# EAGLE board untitled (EAGLE 5.11)
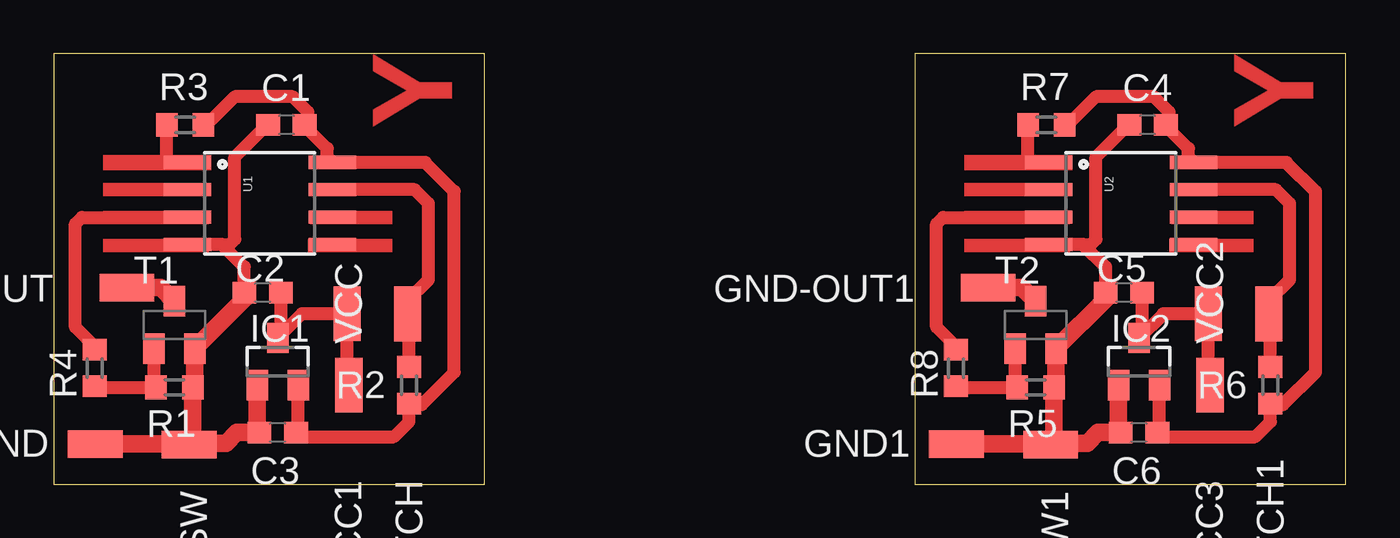
[diagram p0: board, top side]

Size 60 x 20 mm. Coordinates in mm from the lower left corner, seen from the top.
Outline: 0,0 20,0 20,20 0,20 0,0
Outline: 40,0 60,0 60,20 40,20 40,0
Copper layers (1*16): Top 0.035mm / dielectric 1.5mm / Bottom 0.035mm
Design rules "default": minimum track width 10mil, minimum drill 24mil, track to track 8mil, track to pad 8mil, pad to pad 8mil, via to via 8mil, smd to smd 8mil, copper to edge 40mil, drill to drill 8mil, minimum pad ring 10mil, minimum via ring 8mil, stop-mask expansion 4mil, vias tented up to drill 0mil, thermal gap 10mil

## Footprints (pad centres in the part's own frame; a part is rotated, then mirrored left to right if it is on the bottom)
C0603 = smd 1.1 x 1: 1 -0.85,0; 2 0.85,0
SMD1,27-2,54 = smd 1.27 x 2.54: 1 0,0
SOT23 = smd 1 x 1.4: 1 -0.95,-1.1; 2 0.95,-1.1; 3 0,1.1
R0603 = smd 1 x 1.1: 1 -0.85,0; 2 0.85,0
SOT23-BEC = smd 1 x 1.4: B -0.95,-1.1; C 0,1.1; E 0.95,-1.1
SO08-EIAJ = smd 0.61 x 2.21: 1 -1.905,-3.378; 2 -0.635,-3.378; 3 0.635,-3.378; 4 1.905,-3.378; 5 1.905,3.353; 6 0.635,3.353; 7 -0.635,3.353; 8 -1.905,3.353

## Placement (x,y rotation side)
C1  0.1uF  [C0603]  10.8,16.7 180 top
C2  1uF  [C0603]  9.7,8.9 180 top
C3  1uF  [C0603]  10.4,2.4 180 top
C4  0.1uF  [C0603]  50.8,16.7 180 top
C5  1uF  [C0603]  49.7,8.9 180 top
C6  1uF  [C0603]  50.4,2.4 180 top
GND  [SMD1,27-2,54]  1.92,1.87 270 top
GND1  [SMD1,27-2,54]  41.92,1.87 270 top
GND-OUT  [SMD1,27-2,54]  3.39,9.13 90 top
GND-OUT1  [SMD1,27-2,54]  43.39,9.13 90 top
GND-SW  [SMD1,27-2,54]  6.29,1.84 90 top
GND-SW1  [SMD1,27-2,54]  46.29,1.84 90 top
IC1  MCP1702  [SOT23]  10.4,5.7 0 top
IC2  MCP1702  [SOT23]  50.4,5.7 0 top
R1  20K  [R0603]  5.6,4.5 0 top
R2  20K  [R0603]  16.5,4.6 270 top
R3  20K  [R0603]  6.1,16.7 180 top
R4  1K5  [R0603]  1.9,5.4 270 top
R5  20K  [R0603]  45.6,4.5 0 top
R6  20K  [R0603]  56.5,4.6 270 top
R7  20K  [R0603]  46.1,16.7 180 top
R8  1K5  [R0603]  41.9,5.4 270 top
SWITCH  [SMD1,27-2,54]  16.43,7.91 0 top
SWITCH1  [SMD1,27-2,54]  56.43,7.91 0 top
T1  [SOT23-BEC]  5.6,7.4 0 top
T2  [SOT23-BEC]  45.6,7.4 0 top
U1  ATTINY25  [SO08-EIAJ]  9.58,13.05 270 top
U2  ATTINY25  [SO08-EIAJ]  49.58,13.05 270 top
VCC  [SMD1,27-2,54]  13.62,7.92 0 top
VCC1  [SMD1,27-2,54]  13.7,4.6 0 top
VCC2  [SMD1,27-2,54]  53.62,7.92 0 top
VCC3  [SMD1,27-2,54]  53.7,4.6 0 top

## Library data of the parts
C1-C6 = rcl
GND GND1 GND-OUT GND-OUT1 GND-SW GND-SW1 SWITCH SWITCH1 VCC VCC1-VCC3 = wirepad
IC1 IC2 = linear
R1-R8 = resistor
T1 T2 = transistor
U1 U2 = SparkFun

## Nets
GND: C1.2 C2.2 C3.2 GND-SW.1 GND.1 IC1.1 R1.2 T1.E U1.4
GND1: C4.2 C5.2 C6.2 GND1.1 GND-SW1.1 IC2.1 R5.2 T2.E U2.4
N$1: R2.1 SWITCH.1 U1.7
N$2: R1.1 R4.2 T1.B
N$3: R4.1 U1.3
N$4: GND-OUT.1 T1.C
N$5: R3.2 U1.1
N$6: C2.1 IC1.3 VCC1.1 VCC.1
N$7: R5.1 R8.2 T2.B
N$8: R6.1 SWITCH1.1 U2.7
N$9: GND-OUT1.1 T2.C
N$10: R7.2 U2.1
N$11: C5.1 IC2.3 VCC2.1 VCC3.1
N$12: R8.1 U2.3
VCC: C1.1 C3.1 IC1.2 R2.2 R3.1 U1.8
VCC1: C4.1 C6.1 IC2.2 R6.2 R7.1 U2.8

## Tracks (layer width: path | path; a pad name or v marks a point on that pad's centre or on a via)
GND
  Top 0.61: 7.8,11.14 U1.4 | 7.8,11.14 8.18,11.14 8.4,11.37 8.4,15.2 9.9,16.7 C1.2 | C2.2 8.85,10.1 7.8,11.14
  Top 0.813: GND-SW.1 6.45,2 R1.2 6.55,4.6 T1.E 8.85,8.6 C2.2 | GND.1 6.26,1.87 GND-SW.1 | GND-SW.1 6.35,1.9 8,1.9 8.5,2.4 C3.2 9.45,2.5 IC1.1
GND1
  Top 0.61: 47.8,11.14 U2.4 | 47.8,11.14 48.17,11.14 48.4,11.37 48.4,15.2 49.9,16.7 C4.2 | C5.2 48.85,10.1 47.8,11.14
  Top 0.813: GND-SW1.1 46.45,2 R5.2 46.55,4.6 T2.E 48.85,8.6 C5.2 | GND1.1 46.26,1.87 GND-SW1.1 | GND-SW1.1 46.35,1.9 48,1.9 48.5,2.4 C6.2 49.45,2.5 IC2.1
N$1
  Top 0.61: R2.1 16.5,7.84 SWITCH.1 16.43,8.53 17.4,9.5 17.4,13.05 16.77,13.69 U1.7
N$2
  Top 0.61: T1.B 4.65,4.6 R1.1 1.95,4.5 R4.2
N$3
  Top 0.61: R4.1 1.9,6.4 1,7.3 1,12.1 1.3,12.4 6.19,12.4 U1.3
N$4
  Top 0.813: GND-OUT.1 4.97,9.13 T1.C
N$5
  Top 0.61: R3.2 5.25,14.95 5.3,14.9 5.36,14.96 U1.1
N$6
  Top 0.61: C2.1 10.55,6.95 IC1.3 11.52,7.92 VCC.1 13.62,4.68 VCC1.1
N$7
  Top 0.61: T2.B 44.65,4.6 R5.1 41.95,4.5 R8.2
N$8
  Top 0.61: R6.1 56.5,7.84 SWITCH1.1 56.43,8.53 57.4,9.5 57.4,13.05 56.77,13.69 U2.7
N$9
  Top 0.813: GND-OUT1.1 44.97,9.13 T2.C
N$10
  Top 0.61: R7.2 45.25,14.95 45.3,14.9 45.35,14.96 U2.1
N$11
  Top 0.61: C5.1 50.55,6.95 IC2.3 51.52,7.92 VCC2.1 53.62,4.68 VCC3.1
N$12
  Top 0.61: R8.1 41.9,6.4 41,7.3 41,12.1 41.3,12.4 46.19,12.4 U2.3
VCC
  Top 0.61: R3.1 7.1,16.7 8.4,18 11.1,18 11.8,17.3 11.8,16.85 C1.1 11.65,16.65 12.7,15.6 12.7,15.19 U1.8 17.25,14.96 18.6,13.6 18.6,5.2 17.1,3.7 16.55,3.7 R2.2 16.5,2.9 15.8,2.2 11.45,2.2 C3.1 11.35,2.5 IC1.2
VCC1
  Top 0.61: R7.1 47.1,16.7 48.4,18 51.1,18 51.8,17.3 51.8,16.85 C4.1 51.65,16.65 52.7,15.6 52.7,15.19 U2.8 57.24,14.96 58.6,13.6 58.6,5.2 57.1,3.7 56.55,3.7 R6.2 56.5,2.9 55.8,2.2 51.45,2.2 C6.1 51.35,2.5 IC2.2
(copper drawn outside any net)
  shapes: Top area x12

## Text on the board
Top: Y | Y
_tNames: R3 | C1 | R3 | C1 | U1 | U1 | C2 | C2 | GND-OUT | GND-OUT | T1 | T1 | IC1 | VCC | IC1 | VCC | R4 | R4 | R2 | R2 | GND | GND | R1 | R1 | C3 | C3 | GND-SW | GND-SW | VCC1 | SWITCH